# Altium PCB AUX_POWER_-5V.PcbDoc
Units mil, origin at the board's own origin, x right, y up, seen from the top; angles counter-clockwise.
Board outline 680.03 x 1000.03 mil, 2 copper layers (Top Layer, Bottom Layer); 7 components, 5 nets, 24 pads, 0 vias.
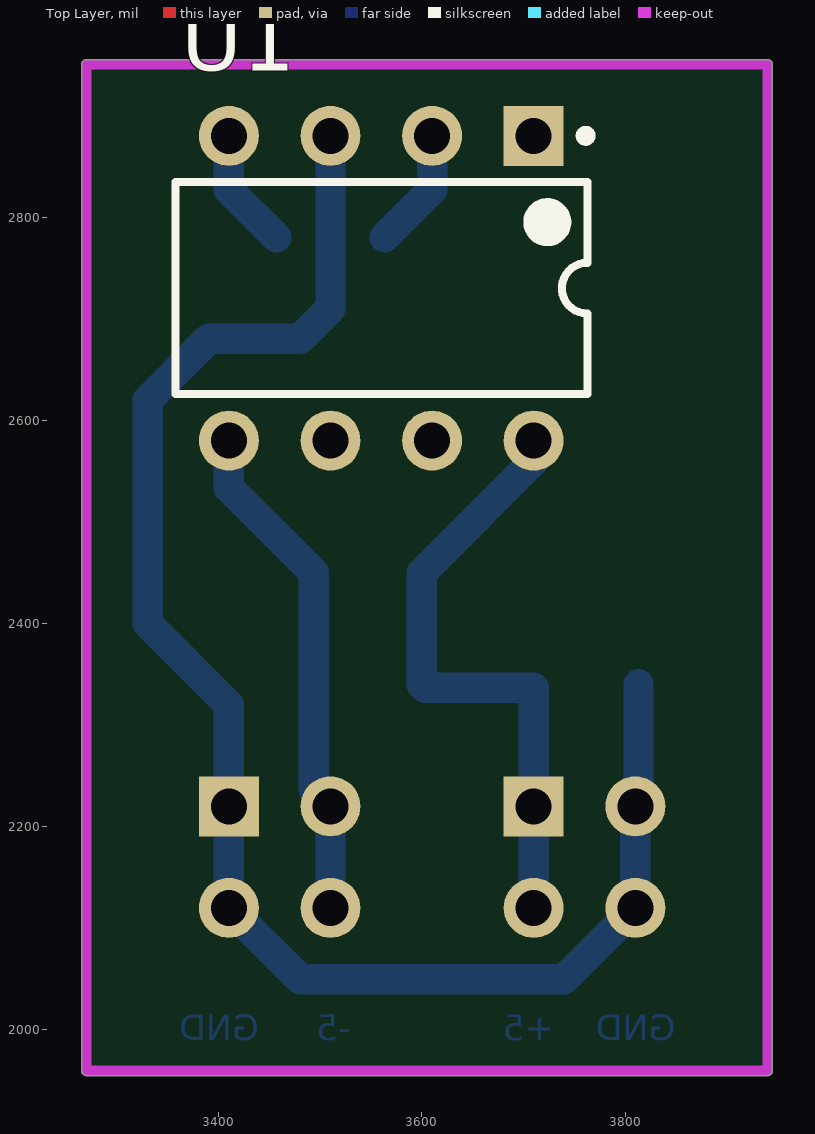
[diagram p0: Top Layer view]
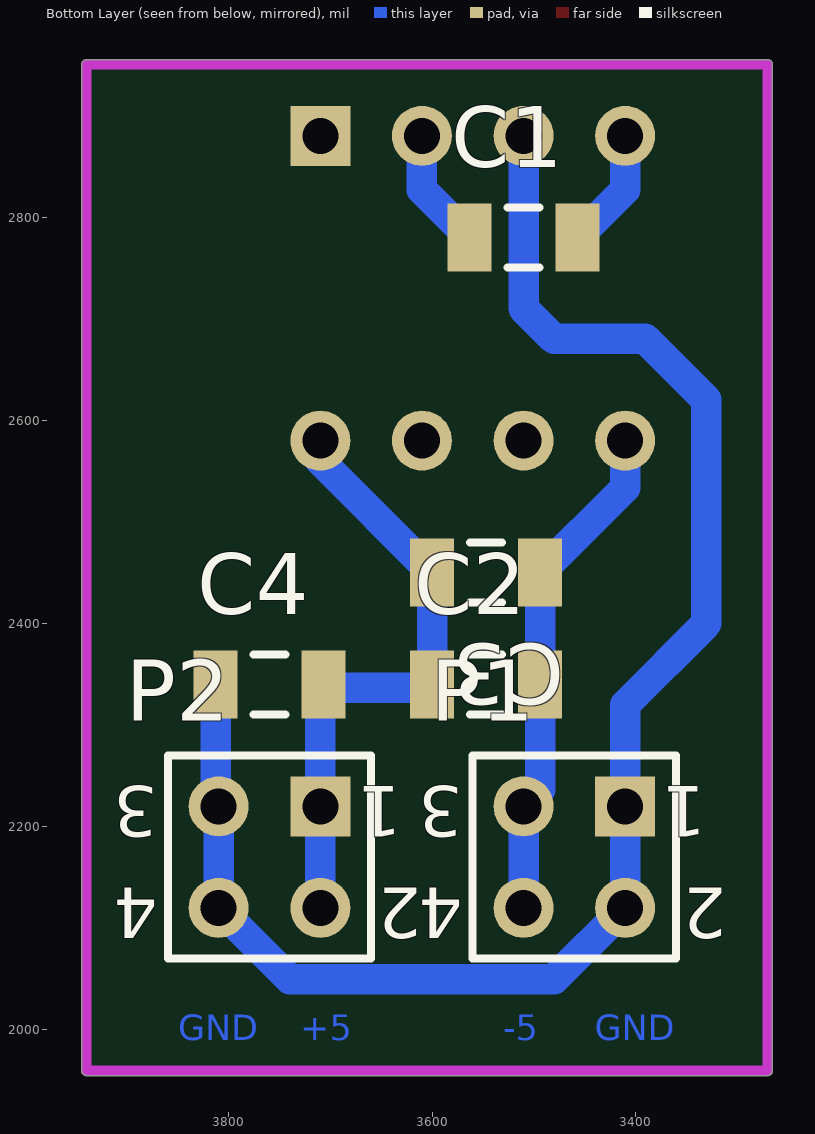
[diagram p1: Bottom Layer view, seen from below]

## Layer stack, top to bottom
Top Solder: solder mask 0.4, Solder Resist, Dk 3.5
Top Layer: signal copper 1.4
Dielectric 1: dielectric 12.6, FR-4, Dk 4.8
Bottom Layer: signal copper 1.4
Bottom Solder: solder mask 0.4, Solder Resist, Dk 3.5

## Board outline
3945.01,1960 cw(c3940,1960) 3940,1954.98 3270,1954.98 cw(c3270,1960) 3264.99,1960 3264.99,2950 cw(c3270,2950) 3270,2955.01 3940,2955.01 cw(c3940,2950) 3945.01,2950

## Design rules (kind name [scope] priority, off if disabled: settings)
Clearance [All] p1: gap=10 ignorepadtopadclearanceinfootprint=FALSE except(0: Arc-Hole Track-Hole SMDPad-Hole THPad-Hole Via-Hole Fill-Hole Poly-Hole Region-Hole Text-Hole)
PolygonConnect [All] p1: connectstyle=Relief reliefconductorwidth=10 reliefentries=4 polygonreliefangle="90 Angle" airgapwidth=10
RoomDefinition AUX_POWER_-5V [InComponentClass('AUX_POWER_-5V')] p1: confinementstyle=ConfineIn formatcopy=TRUE lockcomponents=FALSE outline 3940,1960 3270,1960 3270,2950 3940,2950
RoutingVias [All] p1: holewidth=28 width=50 viastyle="Through Hole" minholewidth=28 minwidth=50 maxholewidth=28 maxwidth=50
SolderMaskExpansion [All] p1: expansion=4
Width [All] p1: maxlimit=50 minlimit=10 preferedwidth=30 minimp=50.000000 maximp=50.000000 favimp=50.000000
30 further rules are at their usual default settings.

## Classes and differential pairs
component class AUX_POWER_-5V: C1 C2 C3 C4 P1 P2

## Components (designator, comment, footprint, x,y, rotation, side; value= is the part's Value field where it differs from the comment)
C1 "Cap" C1206 3510,2780 r180 bottom value=10uF
C2 "Cap" C1206 3546.85,2340 r180 bottom value=10uF
C3 "Cap" C1206 3546.85,2450 r180 bottom value=0.1uF
C4 "Cap" C1206 3760,2340 r0 bottom value=10uF
P1 "Header 2X2" HDR2X2 3410,2220 r0 bottom
P2 "Header 2X2" HDR2X2 3710,2220 r0 bottom
U1 "ICL7660" DIP-8 3560,2730 r270 top

## Footprints (in the part's own frame and the unit in brackets; to place one, negate y for a bottom-side part, rotate by r counter-clockwise, add the part's x,y. Pads: shape width x height; smd on the part's side, far side on the other; paste and mask are expansions set on the pad)
C1206 [mm] "Chip Capacitor, Body 3.2x1.6mm, IPC High Density"
  rect 1.1x1.7 smd: 1(-1.35,0) 2(1.35,0)
  silkscreen extent -0.4,-0.75 0.4,0.75, body extent -1.7,-0.9 1.7,0.9, height 1.3
DIP-8 [mm] "DIP; 8 Leads; Row Spacing 7.62 mm; Pitch 2.54 mm"
  rect 1.5x1.5 hole 0.9: 1(-3.81,3.81)
  round 1.5 hole 0.9: 2(-3.81,1.27) 3(-3.81,-1.27) 4(-3.81,-3.81) 5(3.81,-3.81) 6(3.81,-1.27) 7(3.81,1.27) 8(3.81,3.81)
  silkscreen extent -3.93,-5.15 2.65,5.24, body extent -3.6,-5.15 3.6,5.15, height 5.08
HDR2X2 [mm] "Connector; Header; 2x2 Position"
  rect 1.5x1.5 hole 0.9: 1(0,0)
  round 1.5 hole 0.9: 2(0,2.54) 3(2.54,0) 4(2.54,2.54)
  silkscreen extent -1.27,-1.27 3.81,3.81

## Part data
C1 C2 C3 C4: "Capacitor", LatestRevisionDate=17-Jul-2002, LatestRevisionNote="Re-released for DXP Platform.", PackageDescription="Radial Cap, Thru-Hole; 2 Leads; 0.3 in Pin Spacing", PackageReference=RAD-0.3, Published=8-Jun-2000, Publisher="Altium Limited"
P1 P2: "Header, 2-Pin, Dual row", LatestRevisionDate=17-Jul-2002, LatestRevisionNote="Re-released for DXP Platform.", Publisher="Altium Limited"

## Nets (pads, with @x,y where several pads share a name; then routed paths per layer and width w, separated by ;. In a path a pad name is that pad's centre, name@x,y a point inside that pad or via, vN(x,y) a via of type N, cw(c..) or ccw(c..) an arc to the next point about the centre after c; other vN are vias at no path point)
+5: C2.1 C3.1 C4.1 P2.1 P2.2 U1.8 | length 603.7
  Bottom Layer w30: P2.2 P2.1 3710,2336.85 3603.15,2336.85 C2.1 C3.1 3710,2560 U1.8@3710,2570
-5: C2.2 C3.2 P1.3 P1.4 U1.5 | length 491.4
  Bottom Layer w30: U1.5@3410,2570 3410,2533.7 C3.2 C2.2 3493.7,2236.3 P1.3 P1.4
GND: C4.2 P1.1 P1.2 P2.3 P2.4 U1.3 | length 1599.7
  Bottom Layer w30: U1.3 3510,2710 3480,2680 3390,2680 3330,2620 3330,2400 3410,2320 P1.1 P1.2 3480,2050 3740,2050 P2.4 P2.3 3813.15,2223.15 C4.2
NetC1_1: C1.1 U1.2 | length 119.4
  Bottom Layer w30: C1.1 3610,2826.85 U1.2
NetC1_2: C1.2 U1.4 | length 119.4
  Bottom Layer w30: U1.4 3410,2826.85 C1.2
pads on no net: U1.1 U1.6 U1.7

## Keep-outs
Keep-Out Layer:
  lines w10: 3270,1960 3270,2950 3940,2950 3940,1960 3270,1960

## Other copper
Bottom Layer:
  text "GND" at 3440,1990 h25
  text "-5" at 3530,1990 h25
  text "+5" at 3730,1990 h25
  text "GND" at 3850,1990 h25

## Text inside footprints (layer, text, board x,y; h text height)
P1: Bottom Overlay "1" at 3330,2240 h50 r180; Bottom Overlay "2" at 3310,2140 h50 r180; Bottom Overlay "4" at 3570,2140 h50 r180; Bottom Overlay "3" at 3570,2240 h50 r180
P2: Bottom Overlay "1" at 3630,2240 h50 r180; Bottom Overlay "2" at 3610,2140 h50 r180; Bottom Overlay "4" at 3870,2140 h50 r180; Bottom Overlay "3" at 3870,2240 h50 r180